# EAGLE board iskirpimai (EAGLE 7.2.0)

Size 70 x 22 mm. Coordinates in mm from the lower left corner, seen from the top.
Outline: 0,0 70,0 70,22 0,22 0,0
Outline: 6.5,6.5 19.5,6.5 19.5,16.5 15,16.5 15,18 11,18 11,16.5 6.5,16.5 6.5,6.5
Outline: 46,6.5 64,6.5 64,16.5 61,16.5 61,18 49,18 49,16.5 46,16.5 46,6.5
Copper layers (1*16): Top 0.035mm / dielectric 1.5mm / Bottom 0.035mm
Design rules "default": minimum track width 10mil, minimum drill 24mil, track to track 8mil, track to pad 8mil, pad to pad 8mil, via to via 8mil, smd to smd 8mil, copper to edge 40mil, drill to drill 8mil, minimum pad ring 10mil, minimum via ring 8mil, stop-mask expansion 4mil, vias tented up to drill 0mil, thermal gap 10mil

## Footprints (pad centres in the part's own frame; a part is rotated, then mirrored left to right if it is on the bottom)
MSTBV2 = drill 1.397 long: 1 -2.54,0; 2 2.54,0
MSTBV3 = drill 1.397 long: 1 -5.08,0; 2 0,0; 3 5.08,0

## Placement (x,y rotation side)
E$1  [MSTBV2]  13,11 0 top
E$2  [MSTBV3]  55,11 0 top

## Library data of the parts
E$1 E$2 = con-phoenix-508